# Altium PCB main.PcbDoc
Units mm, origin at the board's own origin, x right, y up, seen from the top; angles counter-clockwise.
Board outline 60 x 38 mm, 4 copper layers (Top copper, Inner copper 1, Inner copper 2, Bottom copper), stack 1.618 mm thick; 4 components, 17 nets, 57 pads, 193 vias.
Unrouted connection lines stored in the file: 10.
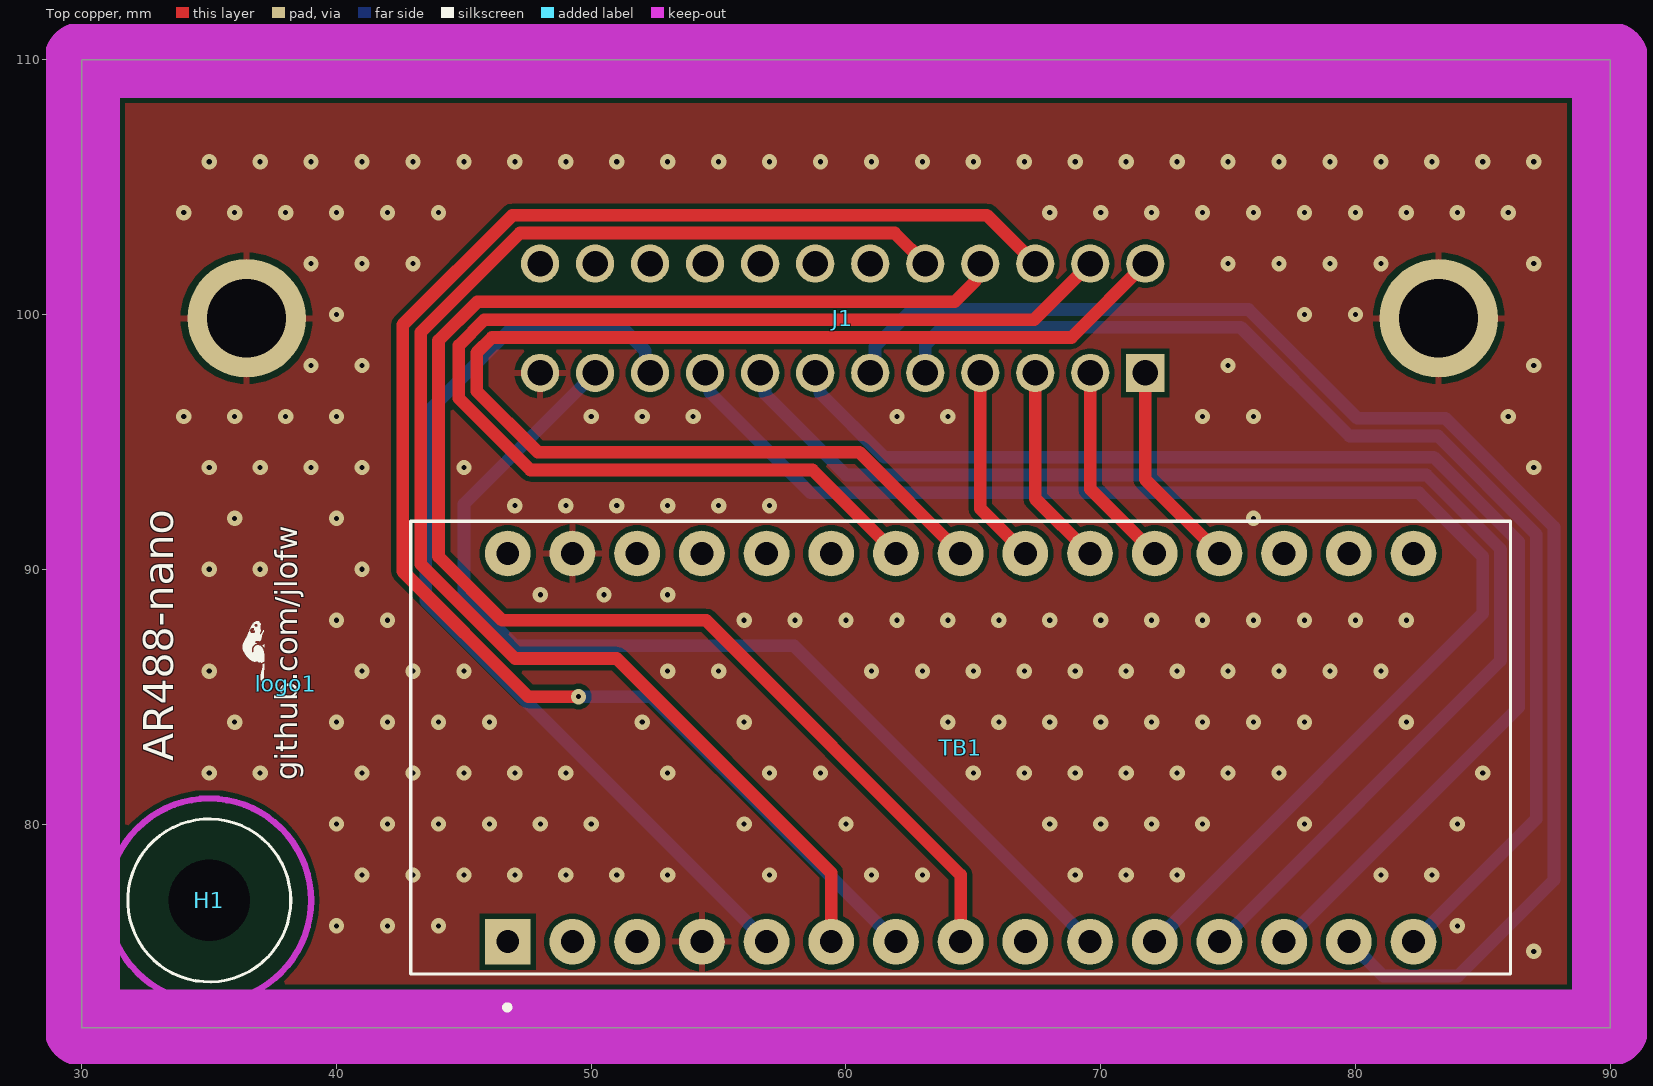
[diagram p0: Top copper view]
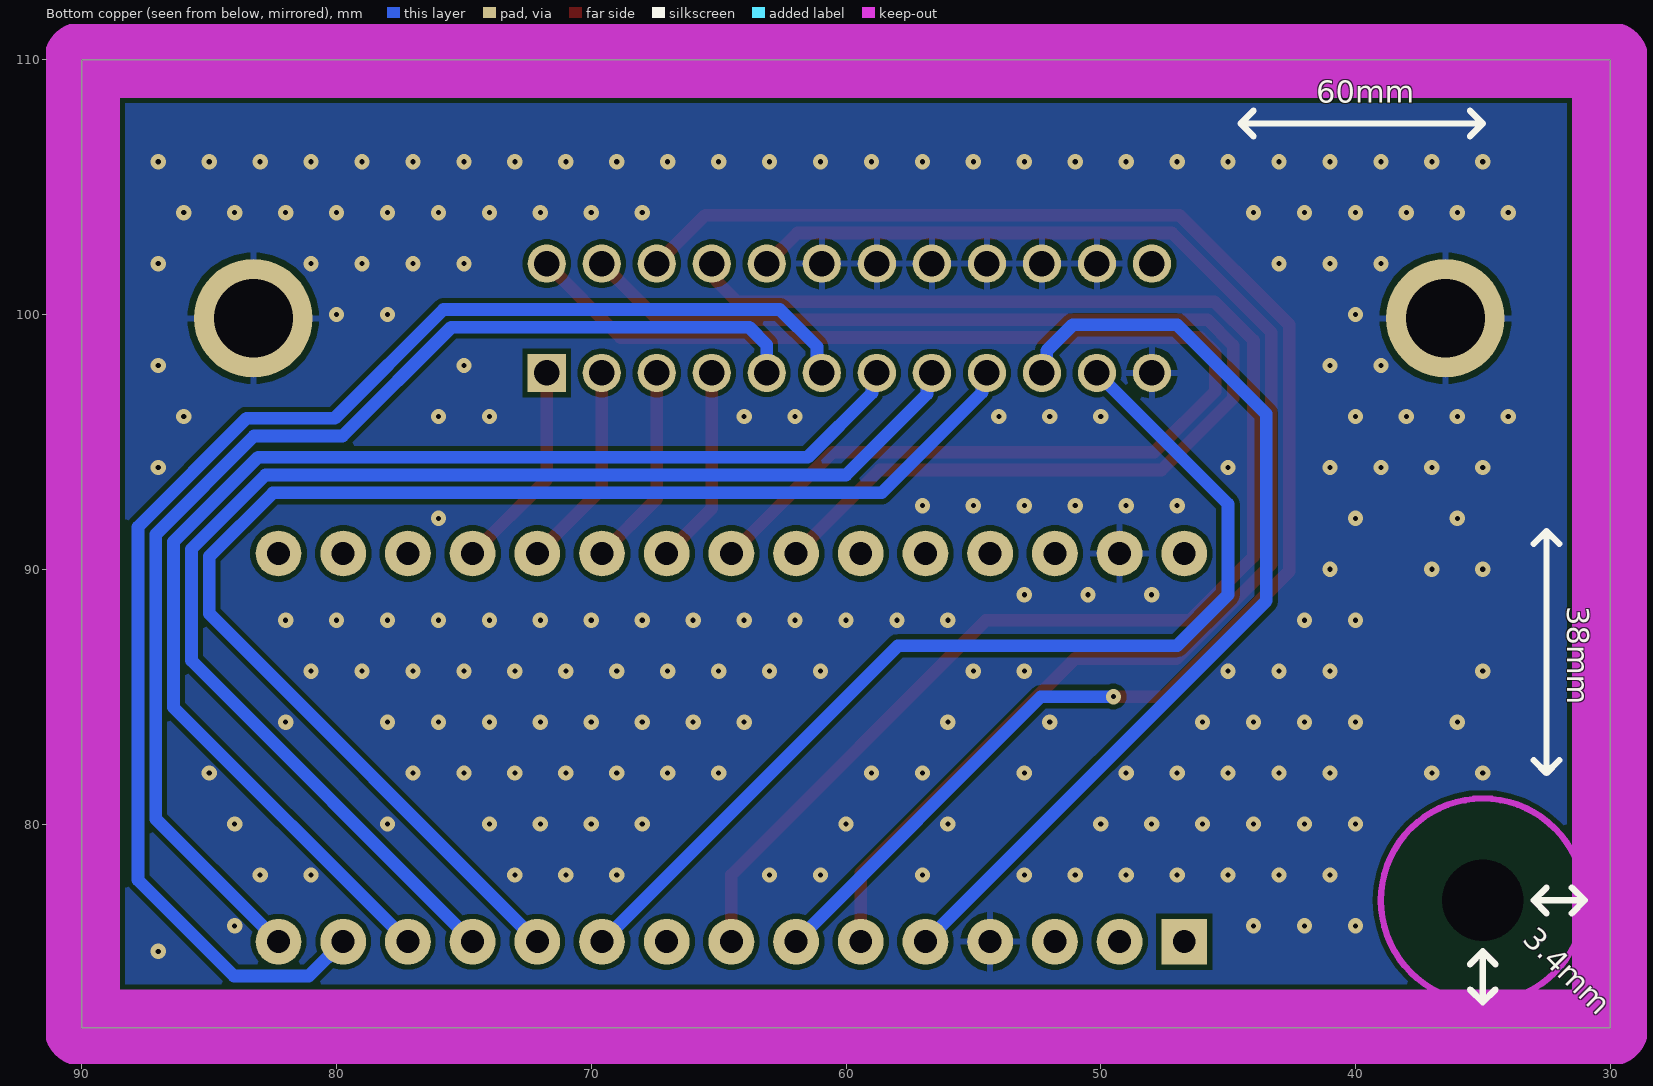
[diagram p1: Bottom copper view, seen from below]
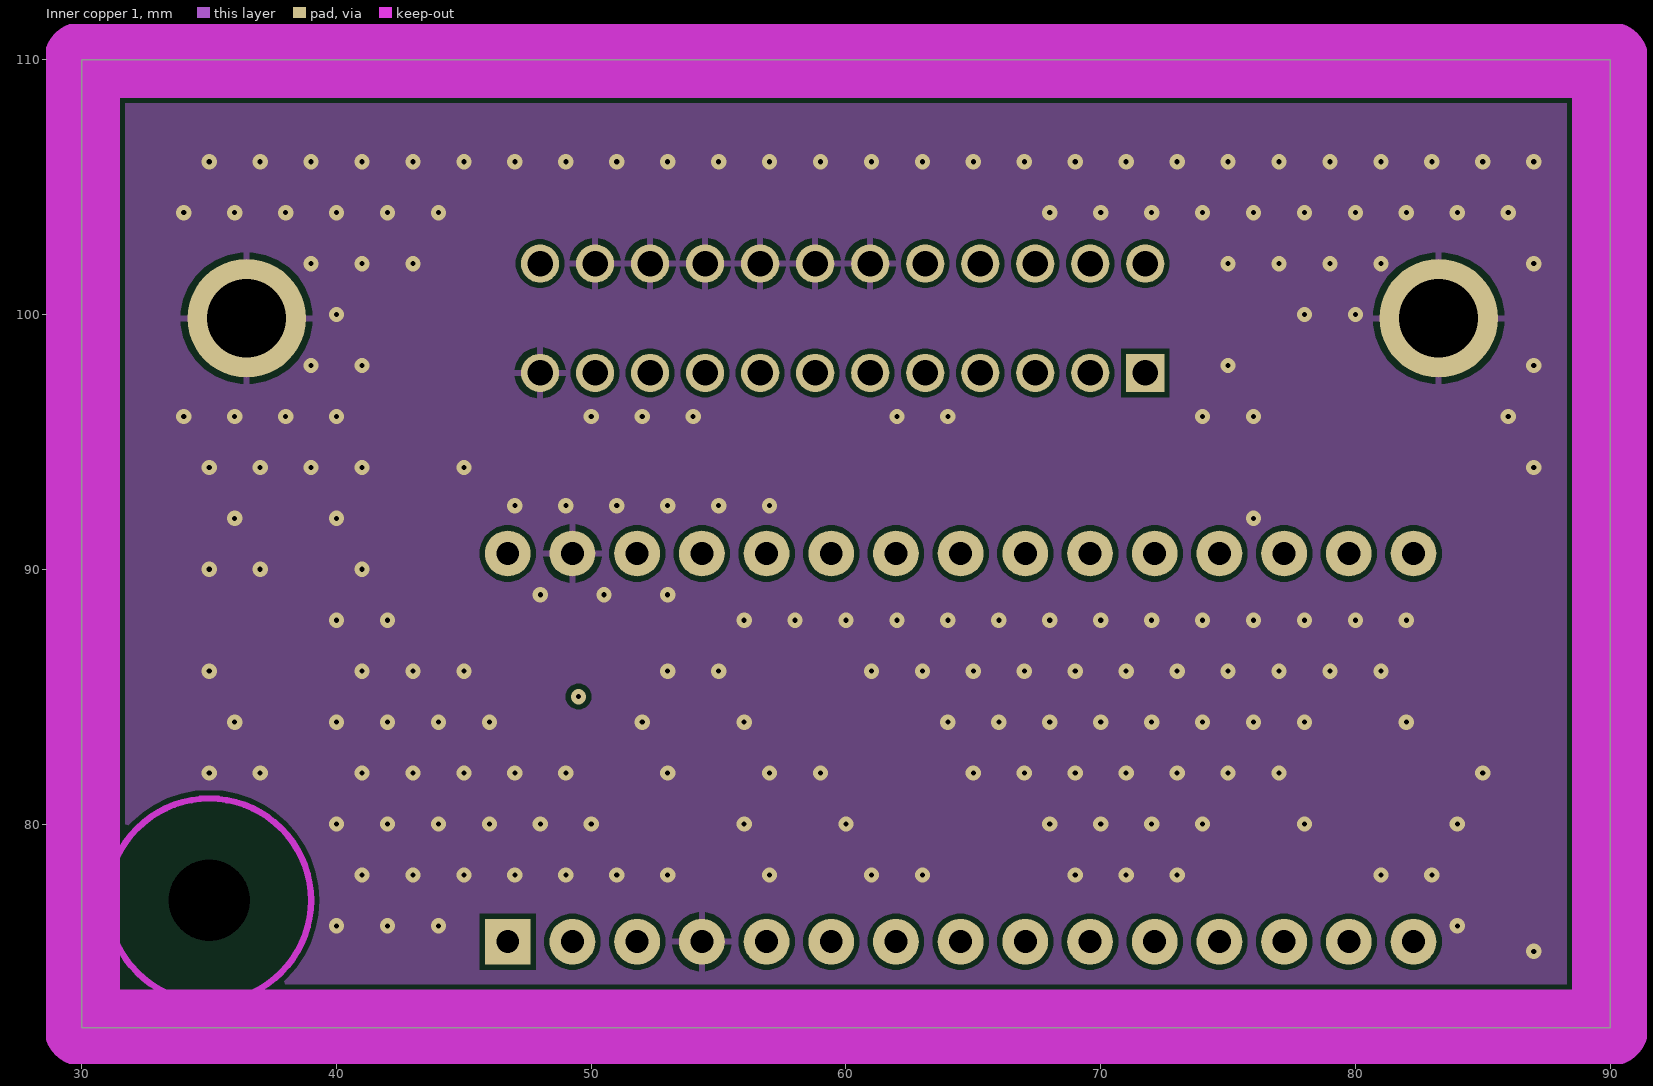
[diagram p2: Inner copper 1]
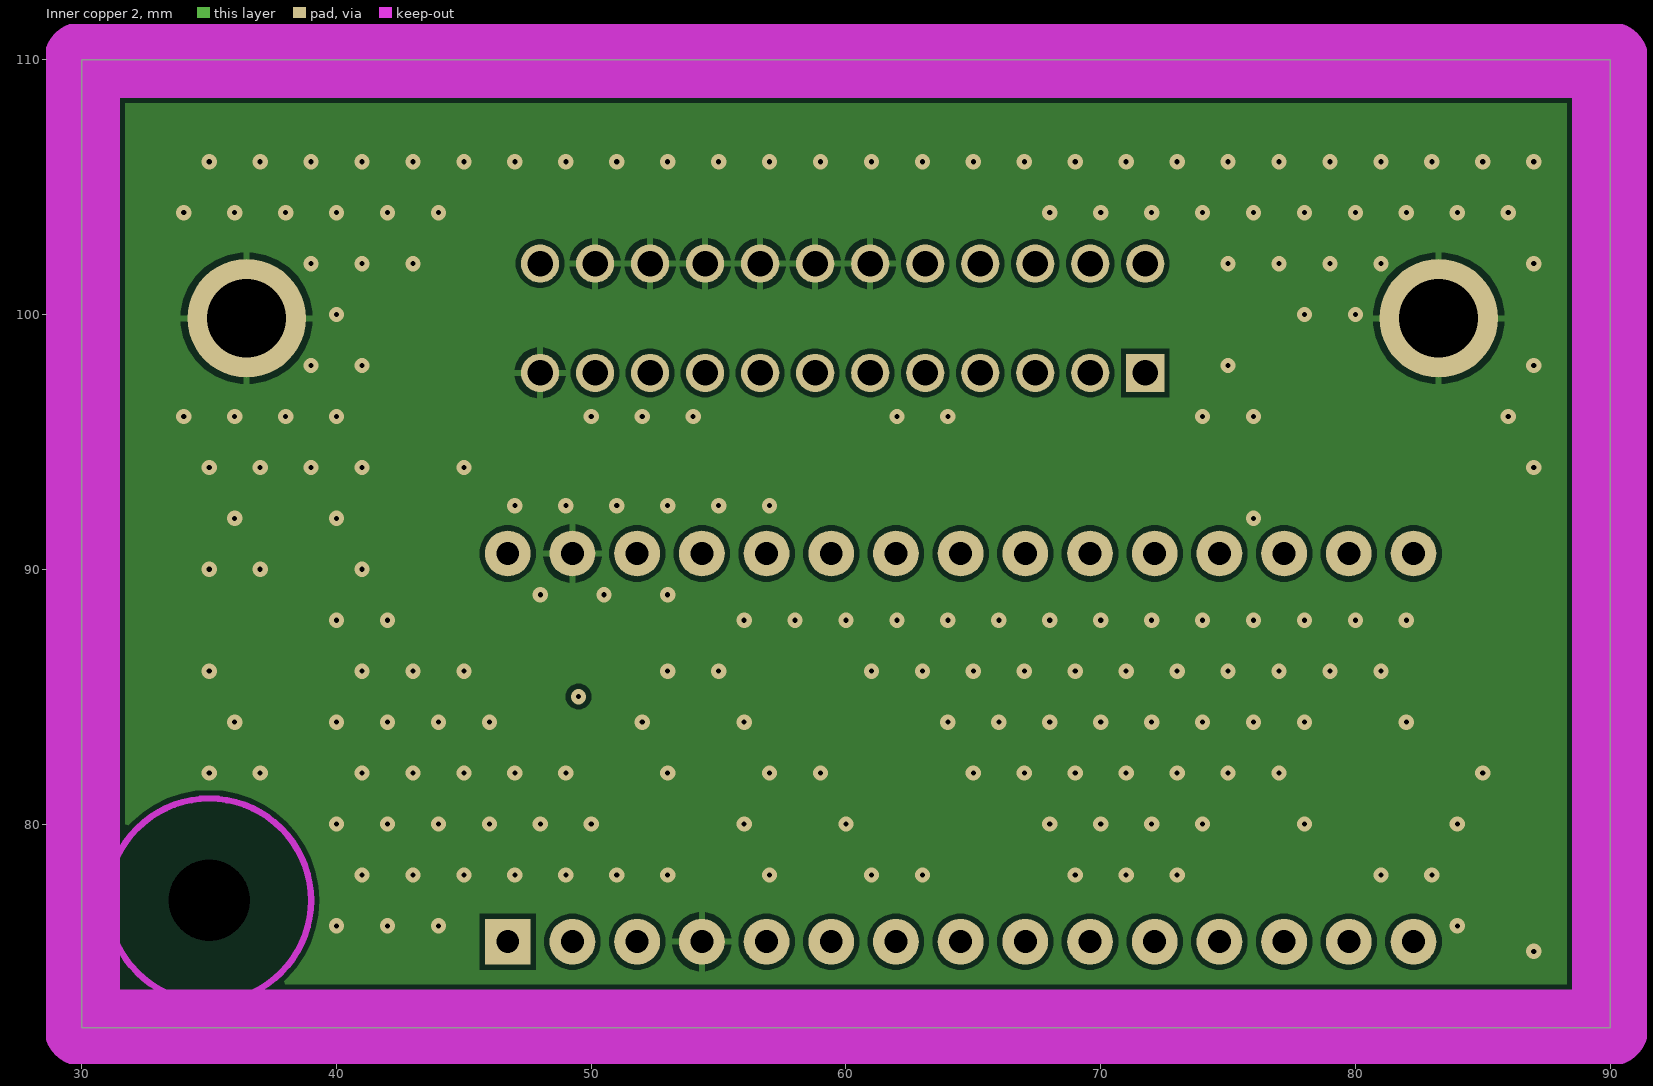
[diagram p3: Inner copper 2]

## Layer stack, top to bottom
Top Solder: solder mask 0.0102, Solder Resist, Dk 3.5
Top copper: signal copper 0.018
Dielectric 4: prepreg 0.078, PP-006, Dk 3.9
Dielectric 2: prepreg 0.078, PP-006, Dk 3.9
Inner copper 1: signal copper 0.035
Dielectric 1: dielectric 1.2, FR-4, Dk 4.4
Inner copper 2: signal copper 0.035
Dielectric 3: prepreg 0.078, PP-006, Dk 3.9
Dielectric 5: prepreg 0.078, PP-006, Dk 3.9
Bottom copper: signal copper 0.018
Bottom Solder: solder mask 0.0102, Solder Resist, Dk 3.5

## Board outline
30,72 30,110 90,110 90,72

## Design rules (kind name [scope] priority, off if disabled: settings)
BoardOutlineClearance [All] p1: gap=0.254 ignorepadtopadclearanceinfootprint=FALSE except(0: Arc-SplitContinuation Track-SplitContinuation SMDPad-SplitContinuation THPad-SplitContinuation Via-SplitContinuation Fill-SplitContinuation Poly-SplitContinuation Region-SplitContinuation Text-SplitContinuation)
Clearance [All] p1: gap=0.2 ignorepadtopadclearanceinfootprint=TRUE except(0.1: Arc-Arc)
DiffPairsRouting [All] p1: maxlimit=0.254 minlimit=0.254 mostfreqgap=0.254 toplayer_minwidth=0.2 toplayer_maxwidth=0.381 toplayer_prefwidth=0.381 midlayer1_minwidth=0.2 midlayer1_maxwidth=0.381 midlayer1_prefwidth=0.381 midlayer2_minwidth=0.2 midlayer2_maxwidth=0.381 midlayer2_prefwidth=0.381 bottomlayer_minwidth=0.2 bottomlayer_maxwidth=0.381 bottomlayer_prefwidth=0.381 maxuncoupledlength=12.7
Height [All] p1: minheight=0 maxheight=1000 prefheight=12.7
HoleSize [All] p1: absolutevalues=TRUE maxlimit=4 minlimit=0.2 maxpercent=80.000 minpercent=20.000
NetsToIgnore [InNet('GND')] p1:
PolygonConnect PowerPolygonConnect [InNetClass('PowerNet')] p1: connectstyle=Direct reliefconductorwidth=0.254 reliefentries=4 polygonreliefangle="90 Angle" airgapwidth=0.254
PolygonConnect [All] p2: thpad.connectstyle=Relief thpad.reliefconductorwidth=0.254 thpad.reliefentries=4 thpad.polygonreliefangle="90 Angle" thpad.airgapwidth=0.254 smdpad.connectstyle=Relief smdpad.reliefconductorwidth=0.254 smdpad.reliefentries=4 smdpad.polygonreliefangle="90 Angle" smdpad.airgapwidth=0.254 via.connectstyle=Direct via.reliefconductorwidth=0.254 via.reliefentries=4 via.polygonreliefangle="90 Angle" via.airgapwidth=0.254
RoutingVias [All] p1: holewidth=0.2 width=0.6 viastyle="Through Hole" minholewidth=0.2 minwidth=0.6 maxholewidth=3 maxwidth=3.6 useviatemplates=TRUE viatemplateguid#1={54EBD77C-0838-4B9A-98DF-B3EACB44B54B} viatemplatename#1=v60h20
SolderMaskExpansion [All] p1: expansion=0.102 istentingtop=FALSE
UnRoutedNet [All] p1: checkbadconnections=TRUE
Width [All] p1: maxlimit=1.5 minlimit=0.2 preferedwidth=0.5
26 further rules are at their usual default settings.

## Components (designator, comment, footprint, x,y, rotation, side; value= is the part's Value field where it differs from the comment)
H1 "Unplated M3 3.2mm" MountingHole_3.2mm_M3_NPTH 35,77 r0 top
J1 "NorComp_112-024-113R001" NorComp_112-024-113R001 71.75,97.71 r180 top
logo1 "beaver" beaver 38,85.5 r90 top
TB1 "arduino_nano_3.0" arduino_nano 64.5,83 r90 top

## Footprints (in the part's own frame and the unit in brackets; to place one, negate y for a bottom-side part, rotate by r counter-clockwise, add the part's x,y. Pads: shape width x height; smd on the part's side, far side on the other; paste and mask are expansions set on the pad)
arduino_nano [mm]
  rect 1.8x1.8 hole 0.9: 1(-7.62,17.78)
  round 1.8 hole 0.9: 2(-7.62,15.24) 3(-7.62,12.7) 4(-7.62,10.16) 5(-7.62,7.62) 6(-7.62,5.08) 7(-7.62,2.54) 8(-7.62,0) 9(-7.62,-2.54) 10(-7.62,-5.08) 11(-7.62,-7.62) 12(-7.62,-10.16) 13(-7.62,-12.7) 14(-7.62,-15.24) 15(-7.62,-17.78) 16(7.62,-17.78) 17(7.62,-15.24) 18(7.62,-12.7) 19(7.62,-10.16) 20(7.62,-7.62) 21(7.62,-5.08) 22(7.62,-2.54) 23(7.62,0) 24(7.62,2.54) 25(7.62,5.08) 26(7.62,7.62) 27(7.62,10.16) 28(7.62,12.7) 29(7.62,15.24) 30(7.62,17.78)
  silkscreen extent -10.3,-21.59 8.89,21.59, body extent -9,-23.4 9,21.6, height 12.6
beaver [mm]
  silkscreen extent 0.08,0.85 2.46,1.69
MountingHole_3.2mm_M3_NPTH [mm] "Unplated M3 mounting hole without pad"
  round 0 hole 3.2 unplated mask+0: 1(0,0)
  silkscreen extent -3.2,-3.2 3.2,3.2
NorComp_112-024-113R001 [mm]
  rect 1.5x1.5 hole 1: 1(0,0)
  round 1.5 hole 1: 2(2.16,0) 3(4.32,0) 4(6.48,0) 5(8.64,0) 6(10.8,0) 7(12.96,0) 8(15.12,0) 9(17.28,0) 10(19.44,0) 11(21.6,0) 12(23.76,0) 13(0,-4.29) 14(2.16,-4.29) 15(4.32,-4.29) 16(6.48,-4.29) 17(8.64,-4.29) 18(10.8,-4.29) 19(12.96,-4.29) 20(15.12,-4.29) 21(17.28,-4.29) 22(19.44,-4.29) 23(21.6,-4.29) 24(23.76,-4.29)
  round 4.65 hole 3.1: G1(-11.52,-2.145) G2(35.28,-2.145)
  body extent -15.47,-22.07 39.23,2.33, height 15.8

## Part data
H1: library part 18003, Internal Number=18003
J1: library part 110030, "I/O-kontaktdon 24P Centronics male R/A dip solder", Manufacturer A=NorComp, Manufacturer A P/N=112-024-113R001, Internal Number=110030
logo1: library part 18008, Internal Number=18008
TB1: library part 130004, "Arduino Nano 3.0", Internal Number=130004

## Via types
v1: diameter 0.6, hole 0.2, Top copper to Bottom copper, 193 vias

## Nets (pads, with @x,y where several pads share a name; then routed paths per layer and width w, separated by ;. In a path a pad name is that pad's centre, name@x,y a point inside that pad or via, vN(x,y) a via of type N, cw(c..) or ccw(c..) an arc to the next point about the centre after c; other vN are vias at no path point)
A0: J1.1 TB1.19 | length 8.3
  Top copper w0.5: J1.1 71.75,93.53 TB1.19
A1: J1.2 TB1.20 | length 8.1
  Top copper w0.5: J1.2 69.59,93.15 TB1.20
A2: J1.3 TB1.21 | length 8
  Top copper w0.5: J1.3 67.43,92.77 TB1.21
A3: J1.4 TB1.22 | length 7.8
  Top copper w0.5: J1.4 65.27,92.39 TB1.22
A4: J1.13 TB1.23 | length 50.8
  Top copper w0.5: TB1.23 60.524,94.596 47.904,94.596 45.5,97 45.5,98.5 46.1,99.1 68.85,99.1 J1.13
A5: J1.14 TB1.24 | length 47.9
  Top copper w0.5: TB1.24 58.684,93.896 47.614,93.896 44.8,96.71 44.8,97.8 44.8,98.79 45.81,99.8 46.8,99.8 67.39,99.8 J1.14
D2: J1.10 TB1.5 | length 37.7
  Bottom copper w0.5: J1.10 52.119,97.901 52.119,98.581 51.1,99.6 47,99.6 43.5,96.1 43.5,88.76 TB1.5
D3: J1.17 TB1.6 | length 54.9
  Top copper w0.5: TB1.6 59.42,78.08 51,86.5 47.01,86.5 43.3,90.21 43.3,99.3 47.2,103.2 61.91,103.2 J1.17
D4: J1.15 TB1.7 | length 62.5
  Top copper w0.5: v1(49.5,85) 47.52,85 42.6,89.92 42.6,99.6 46.9,103.9 65.53,103.9 J1.15
  Bottom copper w0.5: v1(49.5,85) 52.34,85 TB1.7
D5: J1.16 TB1.8 | length 59.6
  Top copper w0.5: TB1.8 64.5,78 54.5,88 46.5,88 44,90.5 44,98.98 45.52,100.5 64.263,100.5 65.079,101.316 65.079,101.809 J1.16
D7: J1.11 TB1.10 | length 41.1
  Bottom copper w0.5: J1.11 45,92.56 45,89 47,87 57.96,87 TB1.10
D8: J1.9 TB1.11 | length 54.3
  Bottom copper w0.5: J1.9 54.661,97.519 54.661,96.939 58.6,93 82.5,93 85,90.5 85,88.26 TB1.11
D9: J1.8 TB1.12 | length 52.3
  Bottom copper w0.5: J1.8 56.821,97.519 56.821,96.879 60,93.7 82.79,93.7 85.7,90.79 85.7,90.099 85.7,86.42 TB1.12
D10: J1.7 TB1.13 | length 50.2
  Bottom copper w0.5: J1.7 58.981,97.519 58.981,96.919 61.5,94.4 83.08,94.4 86.4,91.08 86.4,90.389 86.4,84.58 TB1.13
D11: J1.6 TB1.14 | length 56
  Bottom copper w0.5: J1.6 61.141,97.901 61.141,98.741 62.6,100.2 75.8,100.2 80.07,95.93 83.53,95.93 87.8,91.66 87.8,77.8 84.03,74.03 81.09,74.03 TB1.14
D12: J1.5 TB1.15 | length 46.7
  Bottom copper w0.5: J1.5 63.11,98.81 63.8,99.5 75.5,99.5 79.77,95.23 83.24,95.23 87.1,91.37 87.1,80.2 TB1.15
GND: J1.12 J1.18 J1.19 J1.20 J1.21 J1.22 J1.23 J1.G1 J1.G2 TB1.4 TB1.29
  other v1: 87,75 40,76 42,76 44,76 84,76 41,78 43,78 45,78 47,78 49,78 51,78 53,78 57,78 61,78 63,78 69,78 71,78 73,78 81,78 83,78 40,80 42,80 44,80 46,80 48,80 50,80 56,80 60,80 68,80 70,80 72,80 74,80 78,80 84,80 35,82 37,82 41,82 43,82 45,82 47,82 49,82 53,82 57,82 59,82 65,82 67,82 69,82 71,82 73,82 75,82 77,82 85,82 36,84 40,84 42,84 44,84 46,84 52,84 56,84 64,84 66,84 68,84 70,84 72,84 74,84 76,84 78,84 82,84 35,86 41,86 43,86 45,86 53,86 55,86 61,86 63,86 65,86 67,86 69,86 71,86 73,86 75,86 77,86 79,86 81,86 40,88 42,88 56,88 58,88 60,88 62,88 64,88 66,88 68,88 70,88 72,88 74,88 76,88 78,88 80,88 82,88 48,89 50.5,89 53,89 35,90 37,90 41,90 36,92 40,92 76,92 47,92.5 49,92.5 51,92.5 53,92.5 55,92.5 57,92.5 35,94 37,94 39,94 41,94 45,94 87,94 34,96 36,96 38,96 40,96 50,96 52,96 54,96 62,96 64,96 74,96 76,96 86,96 39,98 41,98 75,98 87,98 40,100 78,100 80,100 39,102 41,102 43,102 75,102 77,102 79,102 81,102 87,102 34,104 36,104 38,104 40,104 42,104 44,104 68,104 70,104 72,104 74,104 76,104 78,104 80,104 82,104 84,104 86,104 35,106 37,106 39,106 41,106 43,106 45,106 47,106 49,106 51,106 53,106 55,106 57,106 59,106 61,106 63,106 65,106 67,106 69,106 71,106 73,106 75,106 77,106 79,106 81,106 83,106 85,106 87,106
pads on no net: H1.1 J1.24 TB1.1 TB1.2 TB1.3 TB1.9 TB1.16 TB1.17 TB1.18 TB1.25 TB1.26 TB1.27 TB1.28 TB1.30

## Polygon pours and split planes (outlines as drawn)
GND on Top copper "GND_L01_P007" (solid, remove dead copper, pour order 7): 30,72 30,110 90,110 90,72
GND on Inner copper 1 "GND_L02_P008" (solid, remove dead copper, pour order 8): 30,72 30,110 90,110 90,72
GND on Inner copper 2 "GND_L03_P009" (solid, remove dead copper, pour order 9): 30,72 30,110 90,110 90,72
GND on Bottom copper "GND_L04_P010" (solid, remove dead copper, pour order 10): 30,72 30,110 90,110 90,72

## Keep-outs
Keep-Out Layer:
  circle w0.25: c35,77 r4
  lines w3: 30,72 30,110 90,110 90,72 30,72

## Silkscreen, mask and mechanical layers (free items; w line width, h text height)
Top Overlay:
  text "AR488-nano" at 33.975,82.468 h2 r90
  text "github.com/jlofw" at 38.756,81.713 h1.5 r90
Bottom Overlay:
  lines w0.25: 31.5,76.5 31,77 ; 31.5,77.5 31,77 ; 32,82.5 32.5,82 ; 32,91 32.5,91.5 ; 32.5,76.5 33,77 ; 32.5,77.5 33,77 ; 33,82.5 32.5,82 ; 33,91 32.5,91.5 ; 35.5,73.5 35,73 ; 35.5,107 35,107.5 ; 35.5,108 35,107.5 ; 44,107 44.5,107.5 ; 44,108 44.5,107.5 ; 31,77 33,77 ; 32.5,82 32.5,91.5 ; 34.5,73.5 35,73 ; 34.5,73.5 34.5,73.5 ; 34.5,73.5 35,73 ; 34.5,74.5 35,75 ; 34.5,74.5 34.5,74.5 ; 34.5,74.5 35,75 ; 35,73 35,73 ; 35,73 35,75 ; 35,75 35.5,74.5 ; 35,75 35.5,74.5 ; 35,75 35,75 ; 35,107.5 44.5,107.5 ; 35.5,74.5 35.5,74.5
  text "60mm" at 41.533,108.019 h1.5
  text "38mm" at 31.981,88.542 h1.5 r90
  text "3.4mm" at 33.687,75.213 h1.5 r45